# Altium PCB arduino_pcbDoc.PcbDoc
Units mm, origin at the board's own origin, x right, y up, seen from the top; angles counter-clockwise.
Board outline 38 x 23 mm, 2 copper layers (Top Layer, Bottom Layer); 24 components, 32 nets, 105 pads, 17 vias.
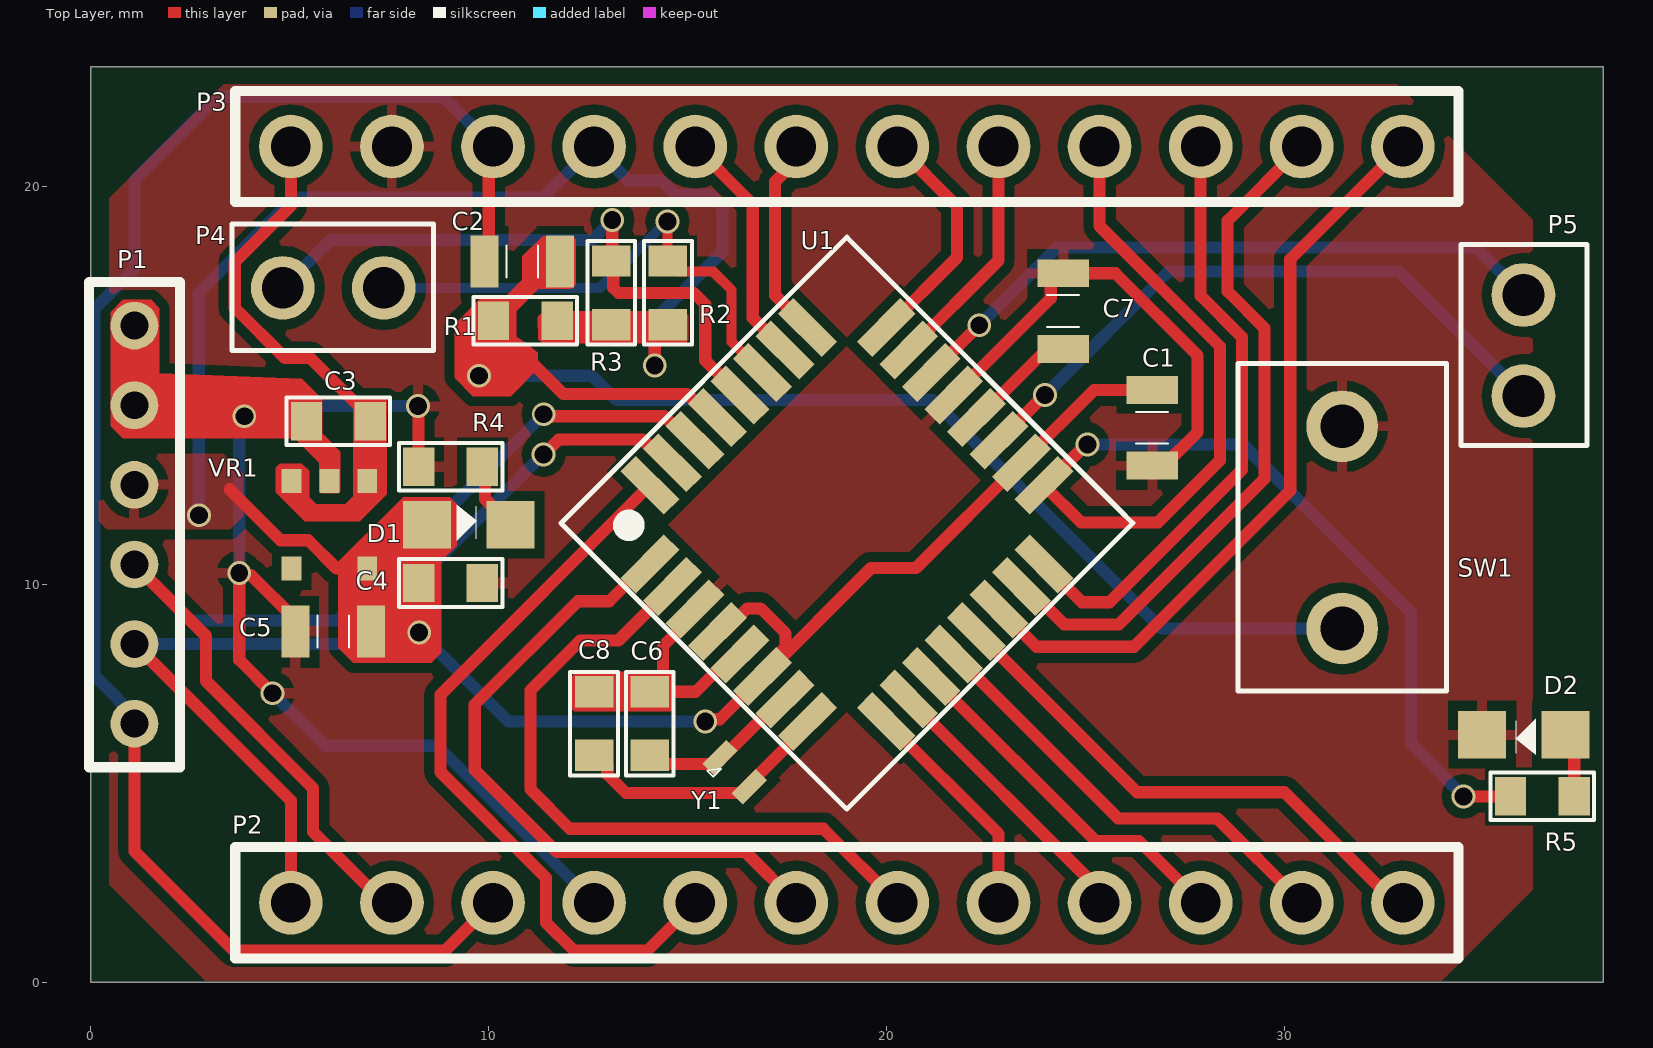
[diagram p0: Top Layer view]
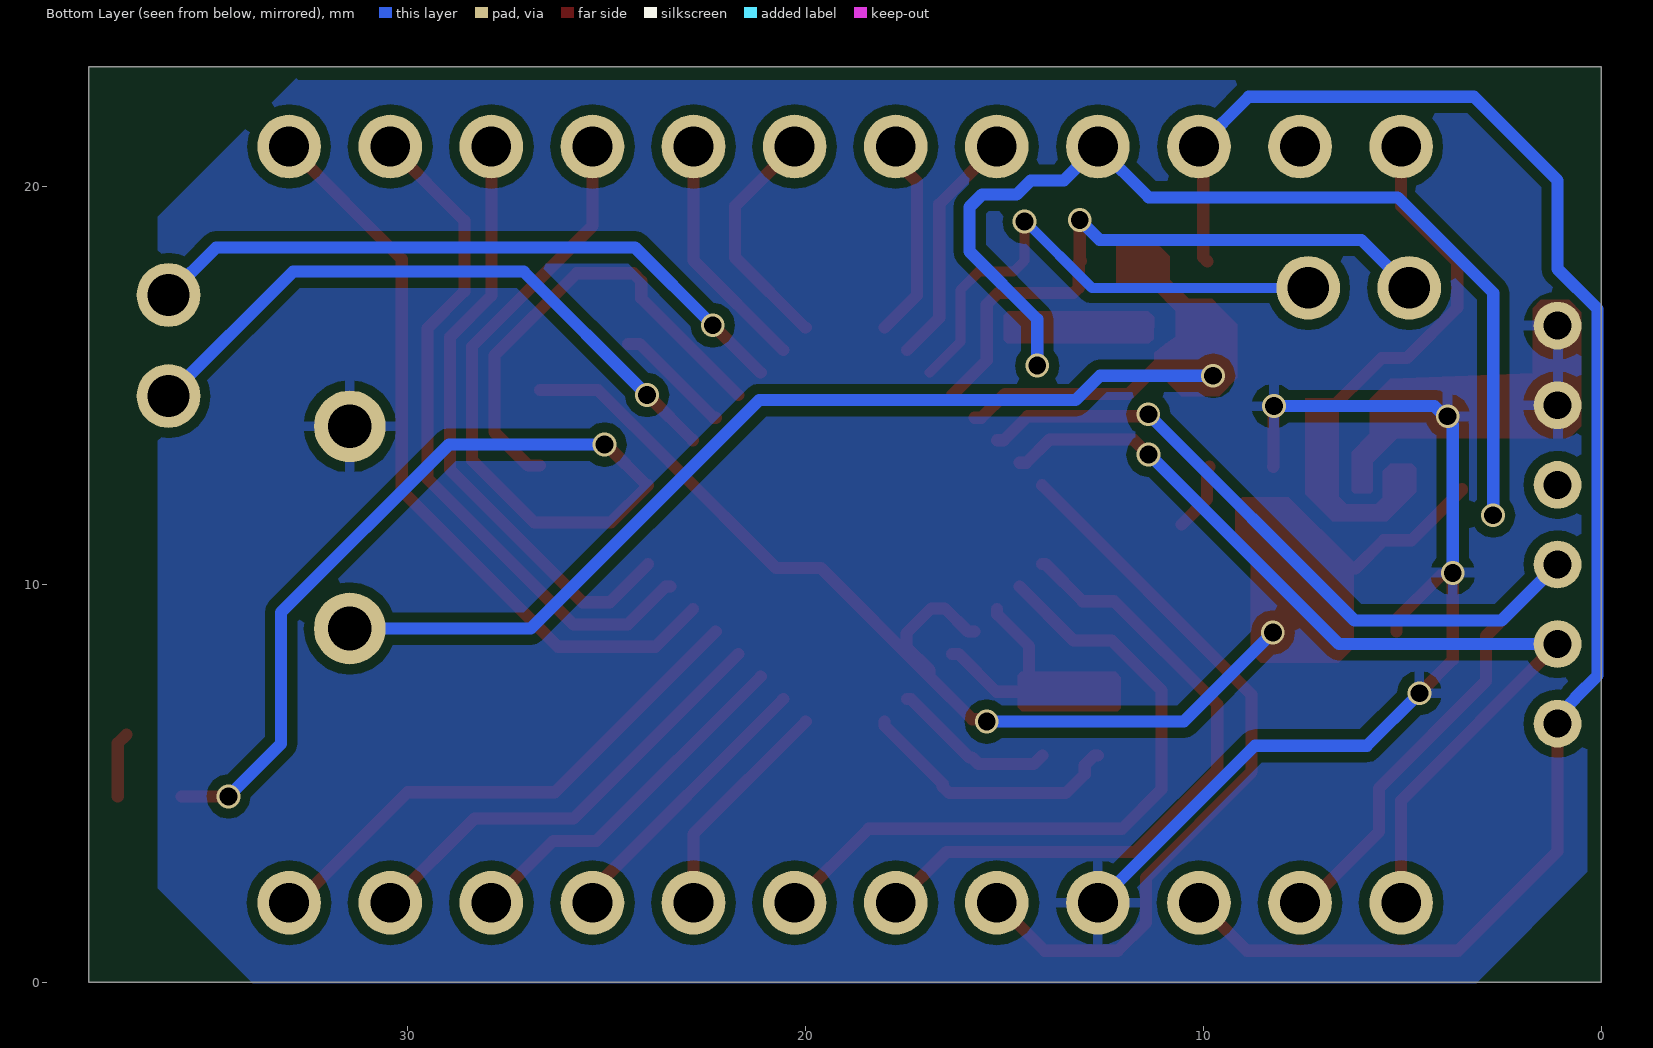
[diagram p1: Bottom Layer view, seen from below]
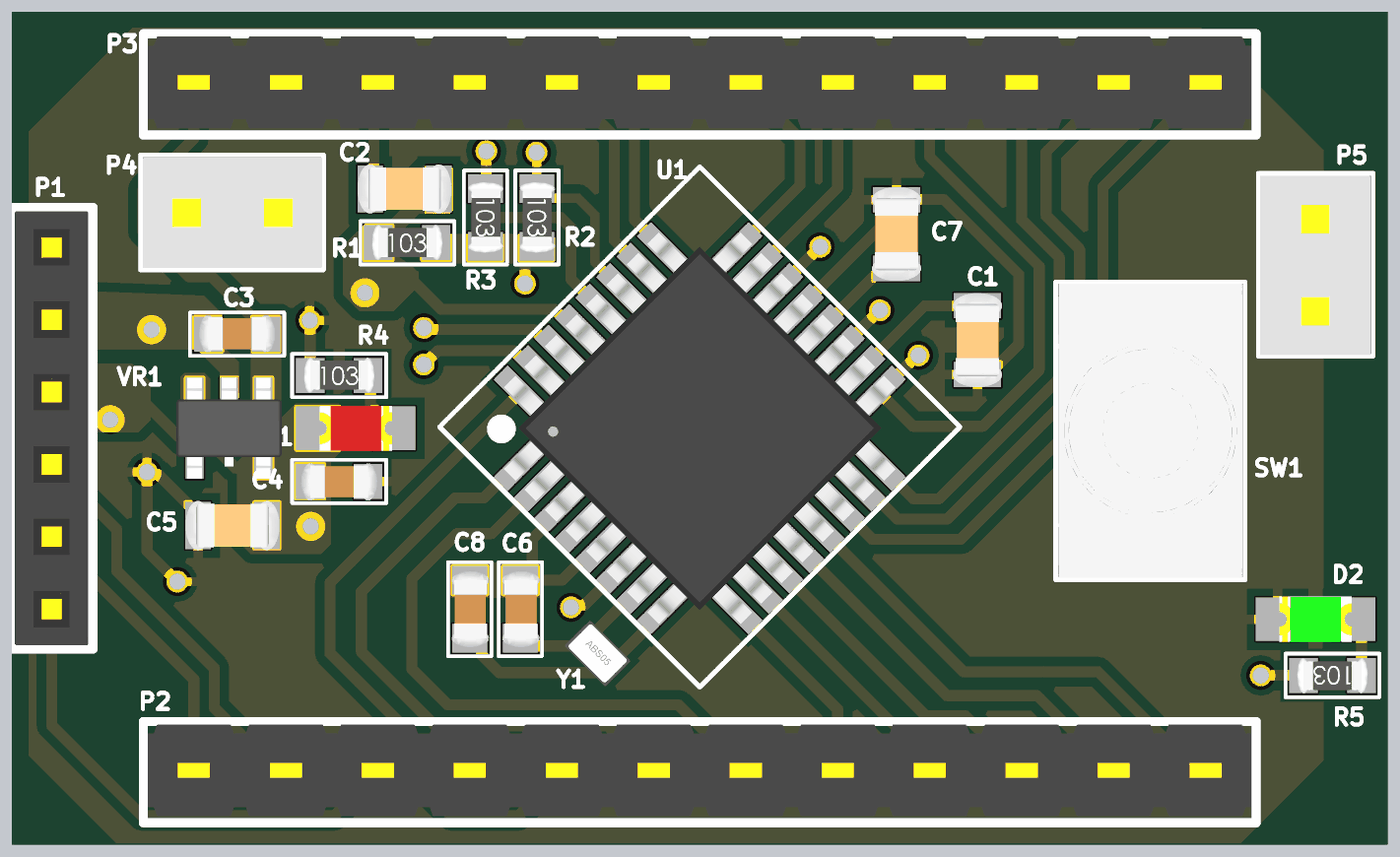
[diagram p2: 3D render of the assembled board from above, using the file's embedded part models]

## Layer stack, top to bottom
Top Solder: solder mask 0.0102, Solder Resist, Dk 3.5
Top Layer: signal copper 0.0356
Dielectric 1: dielectric 0.32, FR-4, Dk 4.8
Bottom Layer: signal copper 0.0356
Bottom Solder: solder mask 0.0102, Solder Resist, Dk 3.5

## Board outline
0,0 38,0 38,23 0,23

## Design rules (kind name [scope] priority, off if disabled: settings)
Clearance [All] p1: gap=0.254 ignorepadtopadclearanceinfootprint=TRUE except(0: Arc-Hole Track-Hole SMDPad-Hole THPad-Hole Via-Hole Fill-Hole Poly-Hole Region-Hole Text-Hole)
PolygonConnect [All] p1: connectstyle=Relief reliefconductorwidth=0.254 reliefentries=4 polygonreliefangle="90 Angle" airgapwidth=0.254
RoutingVias [All] p1: holewidth=0.711 width=1.27 viastyle="Through Hole" minholewidth=0.711 minwidth=1.27 maxholewidth=0.711 maxwidth=1.27
SolderMaskExpansion [All] p1: expansion=0.102 istentingtop=FALSE
Width [All] p1: maxlimit=1.27 minlimit=0.203 preferedwidth=0.254
30 further rules are at their usual default settings.

## Components (designator, comment, footprint, x,y, rotation, side; value= is the part's Value field where it differs from the comment)
C1 "CAP CER 0.1UF 0805" CAP_0805 26.67,13.934 r90 top
C2 "CAP CER 0.1UF 0805" CAP_0805 10.846,18.11 r0 top
C3 "*CAP CER 10UF 4V X5R 0603" 0603_CAP 6.223,14.097 r0 top
C4 "*CAP CER 10UF 4V X5R 0603" 0603_CAP 9.042,10.033 r180 top
C5 "CAP CER 0.1UF 0805" CAP_0805 6.096,8.814 r0 top
C6 "CAP CER 20PF 50V C0G/NP0 0603" 0603_CAP 14.046,6.502 r270 top
C7 "CAP CER 0.1UF 0805" CAP_0805 24.435,16.866 r270 top
C8 "CAP CER 20PF 50V C0G/NP0 0603" 0603_CAP 12.649,6.502 r270 top
D1 "LED RED DIFFUSED 0805 SMD" 0805_RED_LED 9.5,11.5 r0 top
D2 "LED GREEN CLEAR CHIP SMD" 0805_LED_GREEN 36.009,6.223 r180 top
P1 "6pin_1x6_header" 6_PIN_HEADER_1X6 1.1,11.5 r270 top
P2 "header_12pin_1x12" 12_PIN_HEADER_1X12 19,2 r0 top
P3 "header_12pin_1x12" 12_PIN_HEADER_1X12 19,21 r0 top
P4 "2pin_header" 2PIN_HEADER_1X2 6.096,17.45 r180 top
P5 "2pin_header" 2PIN_HEADER_1X2 36,16 r90 top
R1 "RES 10K OHM 0.5% 1/10W 0603" 0603_RES 10.922,16.623 r0 top
R2 "RES_100R_0603" 0603_RES 14.503,17.323 r270 top
R3 "RES_100R_0603" 0603_RES 13.081,17.323 r270 top
R4 "RES 10K OHM 0.5% 1/10W 0603" 0603_RES 9.042,12.954 r0 top
R5 "330R" 0603_RES 36.474,4.674 r180 top
SW1 "push button switch" PUSH_BUTTON 31.445,11.43 r270 top
U1 "IC MCU 8BIT 32KB FLASH 32TQFP" 32-TQFP 19,11.5 r315 top
VR1 "IC REG LINEAR 3.3V 150MA SOT23-5" SOT23-5 6,11.5 r0 top
Y1 "CRYSTAL 20.0000MHZ 20PF SMD" "2-SMD_CRYSTAL 32.7680KHZ" 16.18,5.283 r315 top

## Footprints (in the part's own frame and the unit in brackets; to place one, negate y for a bottom-side part, rotate by r counter-clockwise, add the part's x,y. Pads: shape width x height; smd on the part's side, far side on the other; paste and mask are expansions set on the pad)
"2-SMD_CRYSTAL 32.7680KHZ" [mm]
  rect 0.4x0.86 smd mask+0.05: 1(-0.52,0) 2(0.52,0)
  silkscreen extent -0.51,-0.46 -0.3,-0.19, body extent -0.8,-0.5 0.8,0.5, height 0.5
2PIN_HEADER_1X2 [mm]
  round 1.6 hole 1.05 mask+0.05: 1(-1.27,0) 2(1.27,0)
  silkscreen extent -2.51,-1.6 2.54,1.57, body extent -2.48,-1.52 2.48,1.52, height 8.51
6_PIN_HEADER_1X6 [mm]
  round 1.2 hole 0.7 mask+0.05: 1(-5,0) 2(-3,0) 3(-1,0) 4(1,0) 5(3,0) 6(5,0)
  silkscreen extent -6.1,-1.14 6.1,1.14, body extent -6,-1 6,1, height 3.81
12_PIN_HEADER_1X12 [mm]
  round 1.6 hole 1 mask+0.05: 1(-13.97,0) 2(-11.43,0) 3(-8.89,0) 4(-6.35,0) 5(-3.81,0) 6(-1.27,0) 7(1.27,0) 8(3.81,0) 9(6.35,0) 10(8.89,0) 11(11.43,0) 12(13.97,0)
  silkscreen extent -15.37,-1.4 15.37,1.4, body extent -15.24,-1.22 15.24,1.32, height 5.17
32-TQFP [mm]
  rect 0.55x1.55 smd mask+0.05: 1(-2.8,-4.2) 2(-2,-4.2) 3(-1.2,-4.2) 4(-0.4,-4.2) 5(0.4,-4.2) 6(1.2,-4.2) 7(2,-4.2) 8(2.8,-4.2) 17(2.8,4.2) 18(2,4.2) 19(1.2,4.2) 20(0.4,4.2) 21(-0.4,4.2) 22(-1.2,4.2) 23(-2,4.2) 24(-2.8,4.2)
  rect 1.55x0.55 smd mask+0.05: 9(4.2,-2.8) 10(4.2,-2) 11(4.2,-1.2) 12(4.2,-0.4) 13(4.2,0.4) 14(4.2,1.2) 15(4.2,2) 16(4.2,2.8) 25(-4.2,2.8) 26(-4.2,2) 27(-4.2,1.2) 28(-4.2,0.4) 29(-4.2,-0.4) 30(-4.2,-1.2) 31(-4.2,-2) 32(-4.2,-2.8)
  silkscreen extent -5.11,-5.05 5.05,5.11, body extent -4.62,-4.62 4.62,4.63, height 1.2
0603_CAP [mil]
  rect 31x38 smd mask+1.97: 1(-31.5,0) 2(31.5,0)
  silkscreen extent -51,-24 51,24, body extent -41,-20 41,21, height 31
0603_RES [mil]
  rect 31x38 smd mask+1.97: 1(-31.5,0) 2(31.5,0)
  silkscreen extent -51,-24 51,24, body extent -39,-19 39,20, height 17
0805_LED_GREEN [mm]
  rect 1.2x1.2 smd mask+0.05: 1(1.05,0) 2(-1.05,0)
  silkscreen extent -0.3,-0.4 0.2,0.5, body extent -1,-0.62 1,0.63, height 1.1
0805_RED_LED [mm]
  rect 1.2x1.2 smd mask+0.05: 1(1.05,0) 2(-1.05,0)
  silkscreen extent -0.3,-0.4 0.2,0.5, body extent -1,-0.62 1,0.63, height 1.15
CAP_0805 [mm]
  rect 0.7x1.3 smd mask+0.05: 1(-0.95,0) 2(0.95,0)
  silkscreen extent -0.4,-0.4 0.4,0.4, body extent -1.3,-0.68 1.3,0.68, height 0.9
PUSH_BUTTON [mm]
  round 1.8 hole 1.1 mask+0.05: 1(-2.54,0) 2(2.54,0)
  silkscreen extent -4.11,-2.62 4.11,2.62, body extent -4.06,-2.54 4.07,2.54, height 19.1
SOT23-5 [mm]
  rect 0.5x0.6 smd mask+0.05: 1(0.95,1.1) 2(0,1.1) 3(-0.95,1.1) 4(-0.95,-1.1) 5(0.95,-1.1)
  body extent -1.45,-1.4 1.45,1.4, height 1.2

## Part data
C1 C2 C5 C7: "CAP CER 0.1UF 50V X7R 0805", Capacitance=100nF, Case Code (Metric)=2012, Case Code (Imperial)=0805, Dielectric=X7R, Manufacturer=Samsung, Manufacturer Part Number=CL21B104KBCNNNC, Max Operating Temperature=125°C, Min Operating Temperature=-55°C, Supplier Part Number 1=1276-1003-1-ND, Tolerance=10%, Voltage=50V, Case/Package=0805, Category="Ceramic Capacitors", ComponentLink1Description=https://datasheet.ciiva.com/25710/cl21b104kbcnnnc-25710182.pdf?src-supplier=Digi-Key, ComponentLink1URL=https://datasheet.ciiva.com/25710/cl21b104kbcnnnc-25710182.pdf?src-supplier=Digi-Key, ComponentLink2Description=https://datasheet.ciiva.com/29199/454152-da-01-en-vs-kondensator-0805-29199814.pdf?src-supplier=Conrad, ComponentLink2URL=https://datasheet.ciiva.com/29199/454152-da-01-en-vs-kondensator-0805-29199814.pdf?src-supplier=Conrad, Construction=Flat, Depth=1.25mm, Designer=Dogukan, Height=0.85mm, Lead Free="Lead Free", Length=2mm, Material=Ceramic, Mount="Surface Mount", Packaging="Tape and Reel", Pricing 1="1=0,1, 10=0,044, 50=0,024, 100=0,0196, 500=0,01404, 1000=0,01103 (USD)", Radiation Hardening=No, RoHS=Yes, RoHS Compliant=Yes, Series=CL, Stock 1=1475056, Supplier 1=Digi-Key, Thickness=0.037inch, Voltage Rating=50V, Voltage Rating (DC)=50V, Width=0.049inch
C3 C4: library part "CAP CER 10UF 4V X5R 0603", "0603 10 uF 4 V ±20% Tolerance X5R Multilayer Ceramic Capacitor", Manufacturer=Yageo, Manufacturer Part Number=CC0603MRX5R4BB106, Supplier Part Number 1=311-1812-1-ND, Category="Ceramic Capacitors", ComponentLink1Description=https://www.yageo.com/upload/media/product/productsearch/datasheet/mlcc/UPY-GPHC_X5R_4V-to-50V_26.pdf?src-supplier=Digi-Key, ComponentLink1URL=https://www.yageo.com/upload/media/product/productsearch/datasheet/mlcc/UPY-GPHC_X5R_4V-to-50V_26.pdf?src-supplier=Digi-Key, ComponentLink2Description=http://www.yageo.com/documents/recent/UPY-GPHC_X5R_4V-to-50V_25.pdf?src-supplier=Digi-Key, ComponentLink2URL=http://www.yageo.com/documents/recent/UPY-GPHC_X5R_4V-to-50V_25.pdf?src-supplier=Digi-Key, ComponentLink3Description=http://www.yageo.com/exep/pages/download/literatures/ProductSelectionGuide%202014_Final_2.pdf?src-supplier=Digi-Key, ComponentLink3URL=http://www.yageo.com/exep/pages/download/literatures/ProductSelectionGuide%202014_Final_2.pdf?src-supplier=Digi-Key, ComponentLink4Description=https://datasheet.octopart.com/CC0603MRX5R4BB106-Yageo-datasheet-137875056.pdf?src-supplier=Future+Electronics, ComponentLink4URL=https://datasheet.octopart.com/CC0603MRX5R4BB106-Yageo-datasheet-137875056.pdf?src-supplier=Future+Electronics, Designer=Dogukan, Farad=10uF, Pricing 1="1=0,19, 10=0,132, 50=0,0794, 100=0,067, 500=0,04588, 1000=0,04058 (USD)", RoHS=Yes, Stock 1=69941, Supplier 1=Digi-Key
C6 C8: Capacitance=20pF, Case Code (Metric)=1608, Case Code (Imperial)=0603, Dielectric=C0G, Manufacturer=Samsung, Manufacturer Part Number=CL10C200JB8NNNC, Max Operating Temperature=125°C, Min Operating Temperature=-55°C, Package Quantity=1, Supplier Part Number 1=1276-1187-1-ND, Temperature Coefficient=300ppm/°C, Tolerance=5%, Voltage=50V, Case/Package=0603, Category="Ceramic Capacitors", ComponentLink1Description=https://datasheet.ciiva.com/26877/getdatasheetpartid-640634-26877974.pdf?src-supplier=Verical, ComponentLink1URL=https://datasheet.ciiva.com/26877/getdatasheetpartid-640634-26877974.pdf?src-supplier=Verical, ComponentLink2Description=https://datasheet.ciiva.com/26310/mlcc-catalogdownload2013-eng-26310315.pdf?src-supplier=Distrelec, ComponentLink2URL=https://datasheet.ciiva.com/26310/mlcc-catalogdownload2013-eng-26310315.pdf?src-supplier=Distrelec, Construction=Flat, Depth=0.8mm, Designer=Dogukan, Height=0.8mm, Length=1.6mm, Mount="Surface Mount", Packaging="Tape and Reel", Pricing 1="1=0,1, 10=0,044, 50=0,0238, 100=0,0194, 500=0,01386, 1000=0,01089 (USD)", Radiation Hardening=No, RoHS=Yes, RoHS Compliant=Yes, Series=CL, Stock 1=464918, Supplier 1=Digi-Key, Thickness=0.035inch, Voltage Rating=50V, Width=0.031inch
D1: "Red 645nm LED Indication - Discrete 1.8V 0805 (2012 Metric)", Designer=Dogukan
D2: "Green 569nm LED Indication - Discrete 2.1V 0805 (2012 Metric)", Case Code (Metric)=2012, Case Code (Imperial)=0805, Color=Green, Forward Current=30mA, Forward Voltage=2.1V, Lens Color=Colorless, Manufacturer="Vishay Lite-On", Manufacturer Part Number=LTST-C171GKT, Max Operating Temperature=85°C, Min Operating Temperature=-55°C, Package Quantity=3000, Power Dissipation=100mW, Reverse Voltage=5V, Supplier Part Number 1=160-1423-1-ND, Test Current=10mA, Case/Package=0805, Category=LEDs, ComponentLink1Description=https://datasheet.ciiva.com/11773/0900766b80dc0296-11773991.pdf?src-supplier=Rs, ComponentLink1URL=https://datasheet.ciiva.com/11773/0900766b80dc0296-11773991.pdf?src-supplier=Rs, ComponentLink2Description=https://datasheet.ciiva.com/2110/ltst-c171gkt-2110000.pdf?src-supplier=Digi-Key, ComponentLink2URL=https://datasheet.ciiva.com/2110/ltst-c171gkt-2110000.pdf?src-supplier=Digi-Key, ComponentLink3Description=https://datasheet.ciiva.com/12400/lite-on-ltst-c171gkt-190133-12400647.pdf?src-supplier=Mouser, ComponentLink3URL=https://datasheet.ciiva.com/12400/lite-on-ltst-c171gkt-190133-12400647.pdf?src-supplier=Mouser, ComponentLink4Description=https://datasheet.ciiva.com/2110/ltst-c171gkt-2110001.pdf?src-supplier=Digi-Key, ComponentLink4URL=https://datasheet.ciiva.com/2110/ltst-c171gkt-2110001.pdf?src-supplier=Digi-Key, ComponentLink5Description=https://datasheet.ciiva.com/2110/ltst-c171gkt-2110002.pdf?src-supplier=Digi-Key, ComponentLink5URL=https://datasheet.ciiva.com/2110/ltst-c171gkt-2110002.pdf?src-supplier=Digi-Key, ComponentLink6Description=https://datasheet.ciiva.com/16396/ltst-c171gkt-16396549.pdf?src-supplier=Future+Electronics, ComponentLink6URL=https://datasheet.ciiva.com/16396/ltst-c171gkt-16396549.pdf?src-supplier=Future+Electronics, Depth=1.25mm, Designer=Dogukan, Dominant Wavelength=569nm, Height=0.9mm, Lead Free="Lead Free", Length=2mm, Lens Size=1.25mm, Lens Style=Flat,Diffused,Colorless,Rectangular,Clear, Lens Transparency=Clear, Luminous Intensity=12mcd, Mount="Surface Mount", Number of Elements=1, Number of LEDs=1, Number of Pins=2, Packaging="Tape and Reel", Power Rating=100mW, Pricing 1="1=0,26, 10=0,143, 100=0,0663, 500=0,0612, 1000=0,04794 (USD)", Radiation Hardening=No, RoHS=Yes, RoHS Compliant=Yes, Series=-, Stock 1=213944, Supplier 1=Digi-Key, Viewing Angle=130°, Wavelength=585nm, Width=1.25mm, Illumination Color=Green
R1 R4: "Res Thin Film 0603 10K Ohm 0.5% 1/10W ±25ppm/°C Molded SMD Paper T/R", Case Code (Metric)=1608, Case Code (Imperial)=0603, Manufacturer=Yageo, Manufacturer Part Number=RT0603DRD0710KL, Max Operating Temperature=155°C, Max Power Dissipation=100mW, Min Operating Temperature=-55°C, Resistance=10kR, Supplier Part Number 1=311-10KDCT-ND, Temperature Coefficient=25ppm/°C, Tolerance=0.5%, Voltage Rating (DC)=50V, Case/Package=0603, Category="Chip SMD Resistors", ComponentLink1Description=http://www.yageo.com/documents/recent/PYu-RT_1-to-0.01_RoHS_L_9.pdf?src-supplier=Digi-Key, ComponentLink1URL=http://www.yageo.com/documents/recent/PYu-RT_1-to-0.01_RoHS_L_9.pdf?src-supplier=Digi-Key, ComponentLink2Description=http://www.yageo.com/documents/recent/PYu-RT_1-to-0.05_RoHS_L_(4).pdf?src-supplier=Future+Electronics, ComponentLink2URL=http://www.yageo.com/documents/recent/PYu-RT_1-to-0.05_RoHS_L_(4).pdf?src-supplier=Future+Electronics, Designer=Dogukan, Lead Free="Lead Free", Number of Terminations=2, Packaging="Cut Tape", Power Rating=100mW, Pricing 1="1=0,18, 10=0,151, 100=0,0592, 500=0,0358, 1000=0,02478, 2500=0,02271 (USD)", RoHS=Yes, RoHS Compliant=Yes, Series=RT, Size Code=0603, Stock 1=1584873, Supplier 1=Digi-Key, Width=800um
R2 R3: "Res Thick Film 0603 100 Ohm 1% 1/10W ±100ppm/°C Molded SMD Paper T/R", Case Code (Metric)=1608, Case Code (Imperial)=0603, Manufacturer=Yageo, Manufacturer Part Number=RC0603FR-07100RL, Max Operating Temperature=155°C, Max Power Dissipation=100mW, Min Operating Temperature=-55°C, Resistance=100R, Resistance Tolerance=1%, Resistor Type="Thick Film", Supplier Part Number 1=311-100HRDKR-ND, Temperature Coefficient=100ppm/°C, Voltage Rating=50V, Case/Package=0603, Category="Chip SMD Resistors", ComponentLink1Description=https://datasheet.ciiva.com/7660/38590-7660788.pdf?src-supplier=Element14, ComponentLink1URL=https://datasheet.ciiva.com/7660/38590-7660788.pdf?src-supplier=Element14, ComponentLink2Description=https://datasheet.ciiva.com/11808/0900766b80f96399-11808280.pdf?src-supplier=Rs, ComponentLink2URL=https://datasheet.ciiva.com/11808/0900766b80f96399-11808280.pdf?src-supplier=Rs, ComponentLink3Description=https://datasheet.ciiva.com/22747/443971-22747518.pdf?src-supplier=Element14, ComponentLink3URL=https://datasheet.ciiva.com/22747/443971-22747518.pdf?src-supplier=Element14, ComponentLink4Description=https://datasheet.ciiva.com/46440/1868787-46440890.pdf?src-supplier=Element14, ComponentLink4URL=https://datasheet.ciiva.com/46440/1868787-46440890.pdf?src-supplier=Element14, ComponentLink5Description=https://datasheet.ciiva.com/7746/1738695-7746238.pdf?src-supplier=Element14, ComponentLink5URL=https://datasheet.ciiva.com/7746/1738695-7746238.pdf?src-supplier=Element14, ComponentLink6Description=https://datasheet.ciiva.com/7746/1738695-7746237.pdf?src-supplier=Element14, ComponentLink6URL=https://datasheet.ciiva.com/7746/1738695-7746237.pdf?src-supplier=Element14, Construction=Rectangular, Depth=0.8mm, Designer=Dogukan, Features="Moisture Resistant", Height=0.45mm, Lead Free="Lead Free", Length=1.6mm, Military Standard=Not, Number of Pins=2, Number of Terminations=2, Packaging="Tape and Reel", Power Rating=100mW, Pricing 1="1=0,1, 10=0,018, 50=0,0106, 100=0,0088, 500=0,00592, 1000=0,00505 (USD)", Reach SVHC Compliant=Unknown, RoHS=Yes, RoHS Compliant=Yes, Series=RC, Size Code=0603, Stock 1=7267655, Supplier 1=Digi-Key, Technology="THICK FILM", Termination=SMD/SMT, Tolerance=1%, Voltage Rating (DC)=50V, Width=0.8mm
R5: library part "RES 330 OHM 1% 1/20W 0201", "Res Thick Film 0201 330 Ohm 1% 1/20W ±200ppm/°C Molded SMD SMD Paper T/R", Manufacturer=Yageo, Manufacturer Part Number=RC0201FR-07330RL, Supplier Part Number 1=YAG2604CT-ND, Category="Chip SMD Resistors", ComponentLink1Description=https://datasheet.ciiva.com/8886/pyu-rc0201-51-rohs-l-8-8886150.pdf?src-supplier=Avnet, ComponentLink1URL=https://datasheet.ciiva.com/8886/pyu-rc0201-51-rohs-l-8-8886150.pdf?src-supplier=Avnet, ComponentLink2Description=https://datasheet.ciiva.com/22698/1563626-22698519.pdf?src-supplier=Element14, ComponentLink2URL=https://datasheet.ciiva.com/22698/1563626-22698519.pdf?src-supplier=Element14, ComponentLink3Description=https://datasheet.ciiva.com/7672/1563626-7672221.pdf?src-supplier=Element14, ComponentLink3URL=https://datasheet.ciiva.com/7672/1563626-7672221.pdf?src-supplier=Element14, ComponentLink4Description=https://datasheet.ciiva.com/26829/getdatasheetpartid-732949-26829863.pdf?src-supplier=Verical, ComponentLink4URL=https://datasheet.ciiva.com/26829/getdatasheetpartid-732949-26829863.pdf?src-supplier=Verical, Designer=Dogukan, Pricing 1="1=0,1, 10=0,026, 50=0,0162, 100=0,0136, 500=0,0094, 1000=0,00812, 5000=0,00598 (USD)", RoHS=Yes, Stock 1=553063, Supplier 1=Digi-Key
SW1: library part push_button
U1: library part "Atmega MCU 8BIT 32KB FLASH 32TQFP", "AVR 32KBYTES Flash, 1KBYTES EEPROM, 2KBYTES Ram, W - 20MHZ, TQFP, Extended Temp, Green 5 V T&r", Case/Package=TQFP, Manufacturer=Microchip, Manufacturer Part Number=ATMEGA328PB-ANR, Max Operating Temperature=105°C, Min Operating Temperature=-40°C, Supplier Part Number 1=ATMEGA328PB-ANRCT-ND, ComponentLink1Description=http://www.atmel.com/images/atmel-42397-8-bit-avr-microcontroller-atmega328pb_summary.pdf?src-supplier=Avnet, ComponentLink1URL=http://www.atmel.com/images/atmel-42397-8-bit-avr-microcontroller-atmega328pb_summary.pdf?src-supplier=Avnet, ComponentLink2Description=http://www.microchip.com/mymicrochip/filehandler.aspx?ddocname=en589666&src-supplier=Digi-Key, ComponentLink2URL=http://www.microchip.com/mymicrochip/filehandler.aspx?ddocname=en589666&src-supplier=Digi-Key, ComponentLink3Description=https://datasheet.octopart.com/ATMEGA328PB-ANR-Microchip-datasheet-86810304.pdf?src-supplier=Farnell, ComponentLink3URL=https://datasheet.octopart.com/ATMEGA328PB-ANR-Microchip-datasheet-86810304.pdf?src-supplier=Farnell, ComponentLink4Description=http://www.farnell.com/datasheets/2337828.pdf?src-supplier=Element14, ComponentLink4URL=http://www.farnell.com/datasheets/2337828.pdf?src-supplier=Element14, ComponentLink5Description=https://datasheet.octopart.com/ATMEGA328PB-ANR-Microchip-datasheet-154741725.pdf?src-supplier=Electro+Sonic, ComponentLink5URL=https://datasheet.octopart.com/ATMEGA328PB-ANR-Microchip-datasheet-154741725.pdf?src-supplier=Electro+Sonic, Core Architecture=AVR, Designer=Dogukan, Memory Size=32KB, Memory Type=FLASH, Mount="Surface Mount", Number of I/Os=27, Oscillator Type=Internal, Peripherals="Brown-out Detect/Reset,POR,PWM,WDT", Pricing 1="1=1,85, 25=1,69, 100=1,52 (USD)", RoHS=No, RoHS Compliant=No, Series="AVR® ATmega, Functional Safety (FuSa)", Stock 1=4740, Supplier 1=Digi-Key, Interface=I2C,SPI,UART,USART
VR1: "Linear Voltage Regulator IC Positive Fixed 1 Output 3.3V 150mA SOT-23-5", Case/Package=SOT-23, Dropout Voltage=165mV, Manufacturer=Microchip, Manufacturer Part Number=MIC5205-3.3YM5-TR, Max Operating Temperature=125°C, Max Output Current=150mA, Max Output Voltage=3.3V, Max Supply Voltage=16V, Min Operating Temperature=-40°C, Min Supply Voltage=2.5V, Output Voltage Accuracy=1%, Power Supply Rejection Ratio (PSRR)=75dB, Accuracy=1%, Category="Voltage Regulators - Linear", Designer=Dogukan, Height=1.1mm, Lead Free="Lead Free", Length=2.9mm, Max Input Voltage=16V, Min Input Voltage=2.5V, Mount="Surface Mount", Nominal Output Voltage=3.3V, Number of Outputs=1, Number of Pins=5, Number of Regulators=1, Output Current=150mA, Output Type=Fixed, Output Voltage=3.3V, Packaging="Tape and Reel", Polarity=Positive, Pricing 1="1=0,54, 25=0,45, 100=0,41 (USD)", Radiation Hardening=No, Reach SVHC Compliant=No, RoHS=Yes, RoHS Compliant=Yes, Series=-, Supplier 1=Digi-Key, Termination=SMD/SMT, Width=1.6mm
Y1: library part "CRYSTAL 20MHZ SMD", "Crystal 20MHz ±30ppm (Tol) ±50ppm (Stability) 20pF FUND 30Ohm 2-Pin Mini-SMD T/R", Case/Package=SMD/SMT, ESR (Equivalent Series Resistance)=30R, Frequency=20MHz, Frequency Stability=50ppm, Frequency Tolerance=30ppm, Load Capacitance=20pF, Manufacturer="ECS International", Manufacturer Part Number=ECS-200-20-23A-EN-TR, Max Operating Temperature=85°C, Min Operating Temperature=-10°C, Package Quantity=1000, Supplier Part Number 1=XC988CT-ND, Category=Crystals, ComponentLink1Description=https://datasheet.ciiva.com/859/ecx-64aen-ecx-64cen-859395.pdf?src-supplier=Digi-Key, ComponentLink1URL=https://datasheet.ciiva.com/859/ecx-64aen-ecx-64cen-859395.pdf?src-supplier=Digi-Key, ComponentLink2Description=https://datasheet.ciiva.com/859/ecx-64aen-ecx-64cen-859396.pdf?src-supplier=Digi-Key, ComponentLink2URL=https://datasheet.ciiva.com/859/ecx-64aen-ecx-64cen-859396.pdf?src-supplier=Digi-Key, ComponentLink3Description=https://datasheet.ciiva.com/859/ecx-64aen-ecx-64cen-859397.pdf?src-supplier=Digi-Key, ComponentLink3URL=https://datasheet.ciiva.com/859/ecx-64aen-ecx-64cen-859397.pdf?src-supplier=Digi-Key, Designer=Dogukan, Height=1.1mm, Lead Free="Lead Free", Length=6mm, Mount="Surface Mount", Packaging="Tape and Reel", Pricing 1="1=1,09, 10=0,964, 50=0,9012, 100=0,7963, 500=0,75442 (USD)", RoHS=Yes, Series=ECX-64A, Stock 1=8589, Supplier 1=Digi-Key, Termination=SMD/SMT, Width=3.5mm
P1 P2 P3 P4 P5: Designer=Dogukan

## Via types
v1: diameter 0.6, hole 0.45, Top Layer to Bottom Layer, 17 vias

## Nets (pads, with @x,y where several pads share a name; then routed paths per layer and width w, separated by ;. In a path a pad name is that pad's centre, name@x,y a point inside that pad or via, vN(x,y) a via of type N, cw(c..) or ccw(c..) an arc to the next point about the centre after c; other vN are vias at no path point)
A0: P3.8 U1.23 | length 6
  Top Layer w0.305: U1.23 22.81,18.138 P3.8
A1: P3.7 U1.24 | length 5.9
  Top Layer w0.305: U1.24 20.006,16.45 21.768,18.212 21.768,19.502 P3.7
A2: P3.6 U1.25 | length 5.1
  Top Layer w0.305: P3.6 17.73,20.65 17.196,20.115 17.196,17.264 U1.25
A3: P3.5 U1.26 | length 6
  Top Layer w0.305: P3.5 16.637,19.553 16.637,16.691 U1.26
A4: P4.1 R2.1 U1.27 | length 13.1
  Top Layer w0.254: v1(14.493,19.115) 14.493,18.133 14.77,17.856 15.646,17.856 16.104,17.399 16.104,16.093 U1.27
  Bottom Layer w0.254: P4.1 12.802,17.45 14.467,19.115 v1(14.493,19.115)
A5: P4.2 R3.1 U1.28 | length 15.8
  Top Layer w0.305: v1(13.106,19.152) 13.106,18.148 R3.1 13.132,18.072 13.132,17.451 13.26,17.323 15.154,17.323 15.442,17.035 15.442,15.624 U1.28
  Bottom Layer w0.305: P4.2 6.032,18.656 12.611,18.656 v1(13.106,19.152)
A6: P5.1 U1.19 | length 16.2
  Top Layer w0.305: U1.19 22.83,13.621 23.966,14.757 v1(23.978,14.757)
  Bottom Layer w0.305: v1(23.978,14.757) 27.076,17.856 32.874,17.856 P5.1
A7: P5.2 U1.22 | length 16.7
  Top Layer w0.305: U1.22 21.128,15.318 22.32,16.51 v1(22.327,16.51)
  Bottom Layer w0.305: v1(22.327,16.51) 24.282,18.466 34.804,18.466 P5.2
D2: P2.5 U1.32 | length 18.8
  Top Layer w0.305: U1.32 8.788,7.228 8.788,5.283 11.444,2.628 11.444,1.5 12.15,0.794 13.984,0.794 P2.5
D3: P2.6 U1.1 | length 17
  Top Layer w0.305: U1.1 13.964,10.51 13.03,9.576 12.243,9.576 9.652,6.985 9.652,5.334 11.709,3.277 16.453,3.277 P2.6
D4: P2.7 U1.2 | length 17.5
  Top Layer w0.305: U1.2 13.263,8.591 12.3,8.591 11.049,7.341 11.049,4.851 12.04,3.861 18.409,3.861 P2.7
D5: P2.8 U1.9 | length 5.7
  Top Layer w0.305: U1.9 22.81,3.73 P2.8
D6: P2.9 U1.10 | length 7.1
  Top Layer w0.305: U1.10 25.35,2.322 P2.9
D7: P2.10 U1.11 | length 9.1
  Top Layer w0.305: U1.11 25.247,3.556 26.334,3.556 P2.10
D8: P2.11 U1.12 | length 11.3
  Top Layer w0.305: U1.12 25.82,4.115 28.315,4.115 P2.11
D9: P2.12 U1.13 | length 13.5
  Top Layer w0.305: U1.13 26.29,4.775 29.997,4.775 32.773,2 P2.12
D10: P3.12 U1.14 | length 19.2
  Top Layer w0.305: U1.14 23.764,8.433 26.213,8.433 30.139,12.359 30.139,18.169 P3.12
DTR: C2.1 P1.6 P2.3 P3.3 | length 41.6
  Top Layer w0.305: P1.6 1.1,3.294 3.601,0.794 8.904,0.794 P2.3 ; C2.1 10.003,18.217 10.003,20.893 P3.3
  Bottom Layer w0.305: P1.6 1.1,6.687 0.66,7.126 0.66,7.144 0.094,7.711 0.094,16.917 1.1,17.923 1.1,20.15 3.2,22.25 8.86,22.25 P3.3
GND: C1.1 C3.1 C4.1 C5.1 C6.1 C7.1 C8.1 D2.1 P1.1 P1.2 P2.4 P3.2 R4.1 SW1.1 U1.3 U1.5 U1.21 VR1.2 | length 42.9
  Top Layer w0.305: v1(4.572,7.264) 3.734,8.103 v1(3.734,10.287) 3.79,10.231 4.029,10.231 5.146,9.114 C5.1 ; v1(8.23,14.478) 8.236,14.472 8.236,12.96 R4.1 ; C6.1 C6.1@14.135,7.302 ; U1.3 15.182,9.247 14.376,8.441 14.376,7.544 C6.1@14.135,7.302 ; U1.5 16.145,8.247 15.2,7.302 C6.1@14.135,7.302 ; U1.21 24.121,17.187 24.121,17.618 24.319,17.816 C7.1 25.745,17.816 27.813,15.748 27.813,13.827 26.97,12.984 C1.1
  Bottom Layer w0.305: v1(3.734,10.287) 3.734,14.017 3.861,14.144 v1(3.861,14.224) 3.941,14.224 4.195,14.478 v1(8.23,14.478) ; v1(4.572,7.264) 5.893,5.944 8.706,5.944 P2.4
MISO: P3.10 U1.16 | length 15.3
  Top Layer w0.305: U1.16 24.909,9.55 25.601,9.55 28.931,12.88 28.931,16.211 27.89,17.252 P3.10
MOSI: P3.11 U1.15 | length 17.5
  Top Layer w0.305: U1.15 23.507,9.944 24.46,8.992 25.832,8.992 29.489,12.649 29.489,16.442 28.567,17.365 28.567,19.137 P3.11
NetC2_2: C2.2 R1.1 SW1.2 U1.29 | length 31
  Top Layer w0.305: R1.1 10.122,16.534 11.873,14.783 14.984,14.783 15.58,14.187 U1.29
  Bottom Layer w0.305: v1(9.754,15.24) 12.598,15.24 13.208,14.63 21.158,14.63 26.899,8.89 SW1.2
NetC6_2: C6.2 U1.7 Y1.1 | length 4.2
  Top Layer w0.305: C6.2 14.26,5.488 15.649,5.488 Y1.1 15.879,5.651 17.344,7.116 U1.7
NetC7_2: C7.2 U1.20 | length 3
  Top Layer w0.305: U1.20 22.305,14.187 24.16,16.043 C7.2@24.46,16.043
NetC8_2: C8.2 U1.8 Y1.2 | length 6.7
  Top Layer w0.305: C8.2 12.738,5.702 12.979,5.461 12.979,5.229 13.456,4.753 16.385,4.753 Y1.2 16.547,4.983 18.01,6.445 U1.8
NetD1_1: D1.1 R4.2 | length 1.7
  Top Layer w0.305: R4.2 9.906,12.89 9.906,12.144 D1.1
NetD2_2: D2.2 R5.1 | length 1.6
  Top Layer w0.305: D2.2 37.274,6.007 R5.1
RAW: C3.2 P3.1 VR1.1 VR1.3 | length 9.3
  Top Layer w0.305: P3.1 5.03,19.505 3.62,18.095 3.62,16.95 4.881,15.689 5.52,15.689 7.023,14.186 C3.2
RXI: P1.4 P2.2 U1.30 | length 28.4
  Top Layer w0.305: P1.4 2.896,8.704 2.896,7.569 5.589,4.876 5.589,3.785 7.373,2 P2.2 ; v1(11.383,14.274) 11.433,14.224 14.411,14.224 15.014,13.621 U1.30
  Bottom Layer w0.305: P1.4 2.507,9.093 6.202,9.093 v1(11.383,14.274)
SCK: P3.9 R5.2 U1.17 | length 32.3
  Top Layer w0.305: v1(25.044,13.513) 25.008,13.513 23.986,12.49 U1.17 24.883,11.557 26.817,11.557 28.372,13.111 28.372,15.979 25.35,19.001 P3.9 ; v1(34.493,4.674) R5.2
  Bottom Layer w0.305: v1(25.044,13.513) 28.956,13.513 33.172,9.296 33.172,5.994 v1(34.493,4.674)
TXO: P1.5 P2.1 U1.31 | length 24
  Top Layer w0.305: P1.5 5.03,4.57 P2.1 ; v1(11.379,13.259) 11.759,13.639 13.528,13.639 13.865,13.639 14.448,13.056 U1.31
  Bottom Layer w0.305: P1.5 6.595,8.5 11.354,13.259 v1(11.379,13.259)
VCC: C1.2 C4.2 C5.2 D1.2 P1.3 P3.4 R1.2 R2.2 R3.2 U1.4 U1.6 U1.18 VR1.5 | length 57.4
  Top Layer w0.305: 3.505,12.395 3.505,12.37 4.769,11.106 5.468,11.106 6.175,10.4 VR1.5 ; v1(14.173,15.494) 14.173,16.281 14.414,16.523 R2.2 ; v1(15.443,6.553) 15.5,6.61 15.807,6.61 U1.6 ; U1.4 15.915,8.813 16.498,9.396 16.835,9.396 17.462,8.769 17.462,8.433 16.879,7.849 U1.6 ; C1.2 25.213,14.884 U1.18 20.739,10.411 19.608,10.411 U1.6
  Bottom Layer w0.305: v1(2.718,11.735) 2.718,17.323 5.118,19.723 11.373,19.723 P3.4 13.504,20.146 14.338,20.146 14.69,19.794 15.563,19.794 15.875,19.482 15.875,18.364 14.173,16.662 v1(14.173,15.494) ; v1(8.255,8.788) 10.49,6.553 v1(15.443,6.553)
pads on no net: VR1.4

## Polygon pours and split planes (outlines as drawn)
GND on Top Layer "GND_L01_P000" (solid, remove dead copper, pour order 0): 3.339,22.569 0.469,19.699 0.469,2.452 2.882,0.039 33.946,0.039 36.232,2.325 36.232,19.165 32.829,22.569
VCC on Top Layer "VCC_L01_P002" (solid, pour order 2): 0.203,13.16 0.203,11.582 0.406,11.379 3.505,11.379 3.835,11.709 3.835,12.776 3.327,13.284 0.363,13.284
GND on Bottom Layer "GND_L02_P001" (solid, remove dead copper, pour order 1): 2.334,22.665 0.353,20.684 0.353,2.777 3.147,-0.017 33.881,-0.017 36.268,2.37 36.268,19.236 32.788,22.716 32.738,22.665

## Other copper
Top Layer:
  region net NetC2_2: 9.601,16.993 9.144,16.535 9.144,15.189 9.601,14.732 10.552,14.732 11.238,15.418 11.238,15.813 10.969,16.038
  region net NetC2_2: 12.192,18.669 12.116,18.745 11.354,18.745 10.846,18.237 10.846,17.653 10.363,17.17 9.779,17.17 9.601,16.993 9.601,16.129 9.779,15.951 10.414,15.951 10.693,16.231 10.693,16.866 11.252,17.424 12.09,17.424 12.192,17.526
  region net GND: 1.727,15.088 1.956,14.859 1.708,14.859
  region net GND: 1.658,13.734 1.727,13.665 5.69,13.665 5.817,13.792 5.817,14.656 5.309,15.164 1.727,15.303
  region net GND: 6.274,12.344 6.223,12.294 5.791,12.294 5.74,12.344 5.74,13.056 5.029,13.767 5.029,14.503 5.105,14.58 5.715,14.58 5.817,14.478 5.817,13.792 6.274,13.335
  region net VCC: 11.237,16.723 11.379,16.866 14.91,16.866 15.011,16.764 15.011,16.129 14.935,16.053 11.354,16.053 11.252,16.155
  region net GND: 12.078,7.671 12.078,6.883 12.154,6.807 14.567,6.807 14.668,6.909 14.668,7.722 14.592,7.798 12.205,7.798
  region net GND: 0.508,16.84 0.508,13.97 0.813,13.665 1.727,13.665 1.727,16.942 1.524,17.145 0.813,17.145
  region net RAW: 7.442,12.268 6.756,11.582 5.385,11.582 4.648,12.319 4.648,12.929 4.75,13.03 5.309,13.03 5.486,12.852 5.486,12.192 5.664,12.014 6.401,12.014 6.604,12.217 6.604,14.681 7.442,14.681
  region net VCC: 7.849,12.192 6.223,10.566 6.223,8.407 6.604,8.026 8.56,8.026 8.814,8.28 8.814,10.592 9.195,10.973 9.195,12.014 9.017,12.192

## Silkscreen, mask and mechanical layers (free items; w line width, h text height)
Drill Guide:
  the board outline again, w0.254

## Text inside footprints (layer, text, board x,y; h text height)
C1: Top Designator "d.Designator" at 26.66,12.544 h0.05 r90
C2: Top Designator "d.Designator" at 9.456,18.12 h0.05
C5: Top Designator "d.Designator" at 4.706,8.824 h0.05
C7: Top Designator "d.Designator" at 24.445,18.256 h0.05 r270
D1: Top Designator "d.Designator" at 8.557,11.374 h0.4
D2: Top Designator "d.Designator" at 36.951,6.349 h0.4 r180
P1: Top Designator "d.Designator" at 0.389,13.608 h0.51 r270
P2: Top Designator "d.Designator" at 17.552,0.882 h0.51
P3: Top Designator "d.Designator" at 17.552,19.882 h0.51
P4: Top Designator "d.Designator" at 7.163,18.72 h0.25 r180
P5: Top Designator "d.Designator" at 37.27,14.933 h0.25 r90
SW1: Top Designator "d.Designator" at 32.766,13.538 h0.51 r270
U1: Top Designator "d.Designator" at 15.372,11.428 h0.51 r315
VR1: Top Designator "d.Designator" at 5.447,11.255 h0.3
Y1: Top Designator "d.Designator" at 15.593,5.488 h0.15 r315